# Altium PCB BNO055_Xplained_pro.PcbDoc
Units mm, origin at the board's own origin, x right, y up, seen from the top; angles counter-clockwise.
Board outline 37.5 x 30 mm, 4 copper layers (Top Layer LF-signals, Internal Plane 1, Internal Plane 2, Bottom Layer LF-signals), stack 1.379 mm thick; 36 components, 25 nets, 147 pads, 34 vias.
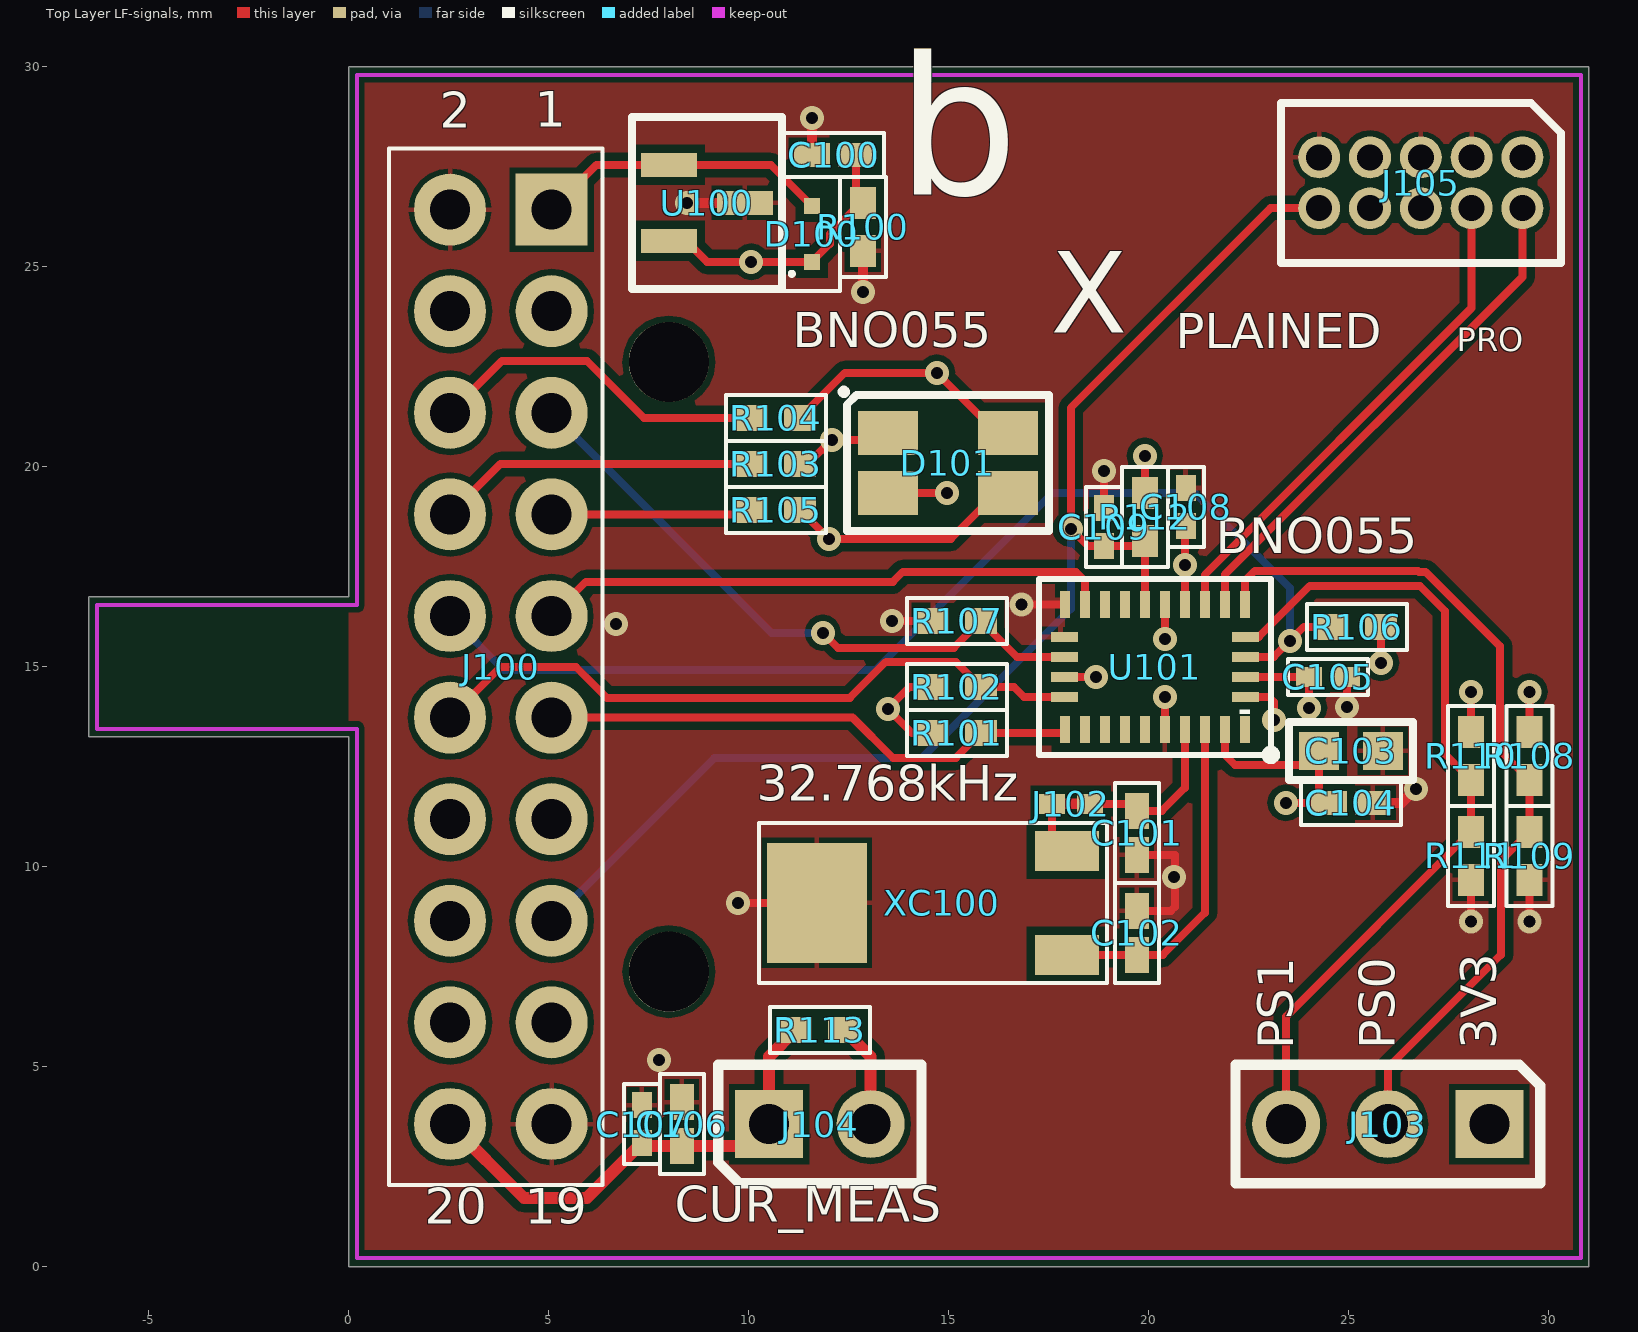
[diagram p0: Top Layer LF-signals view]
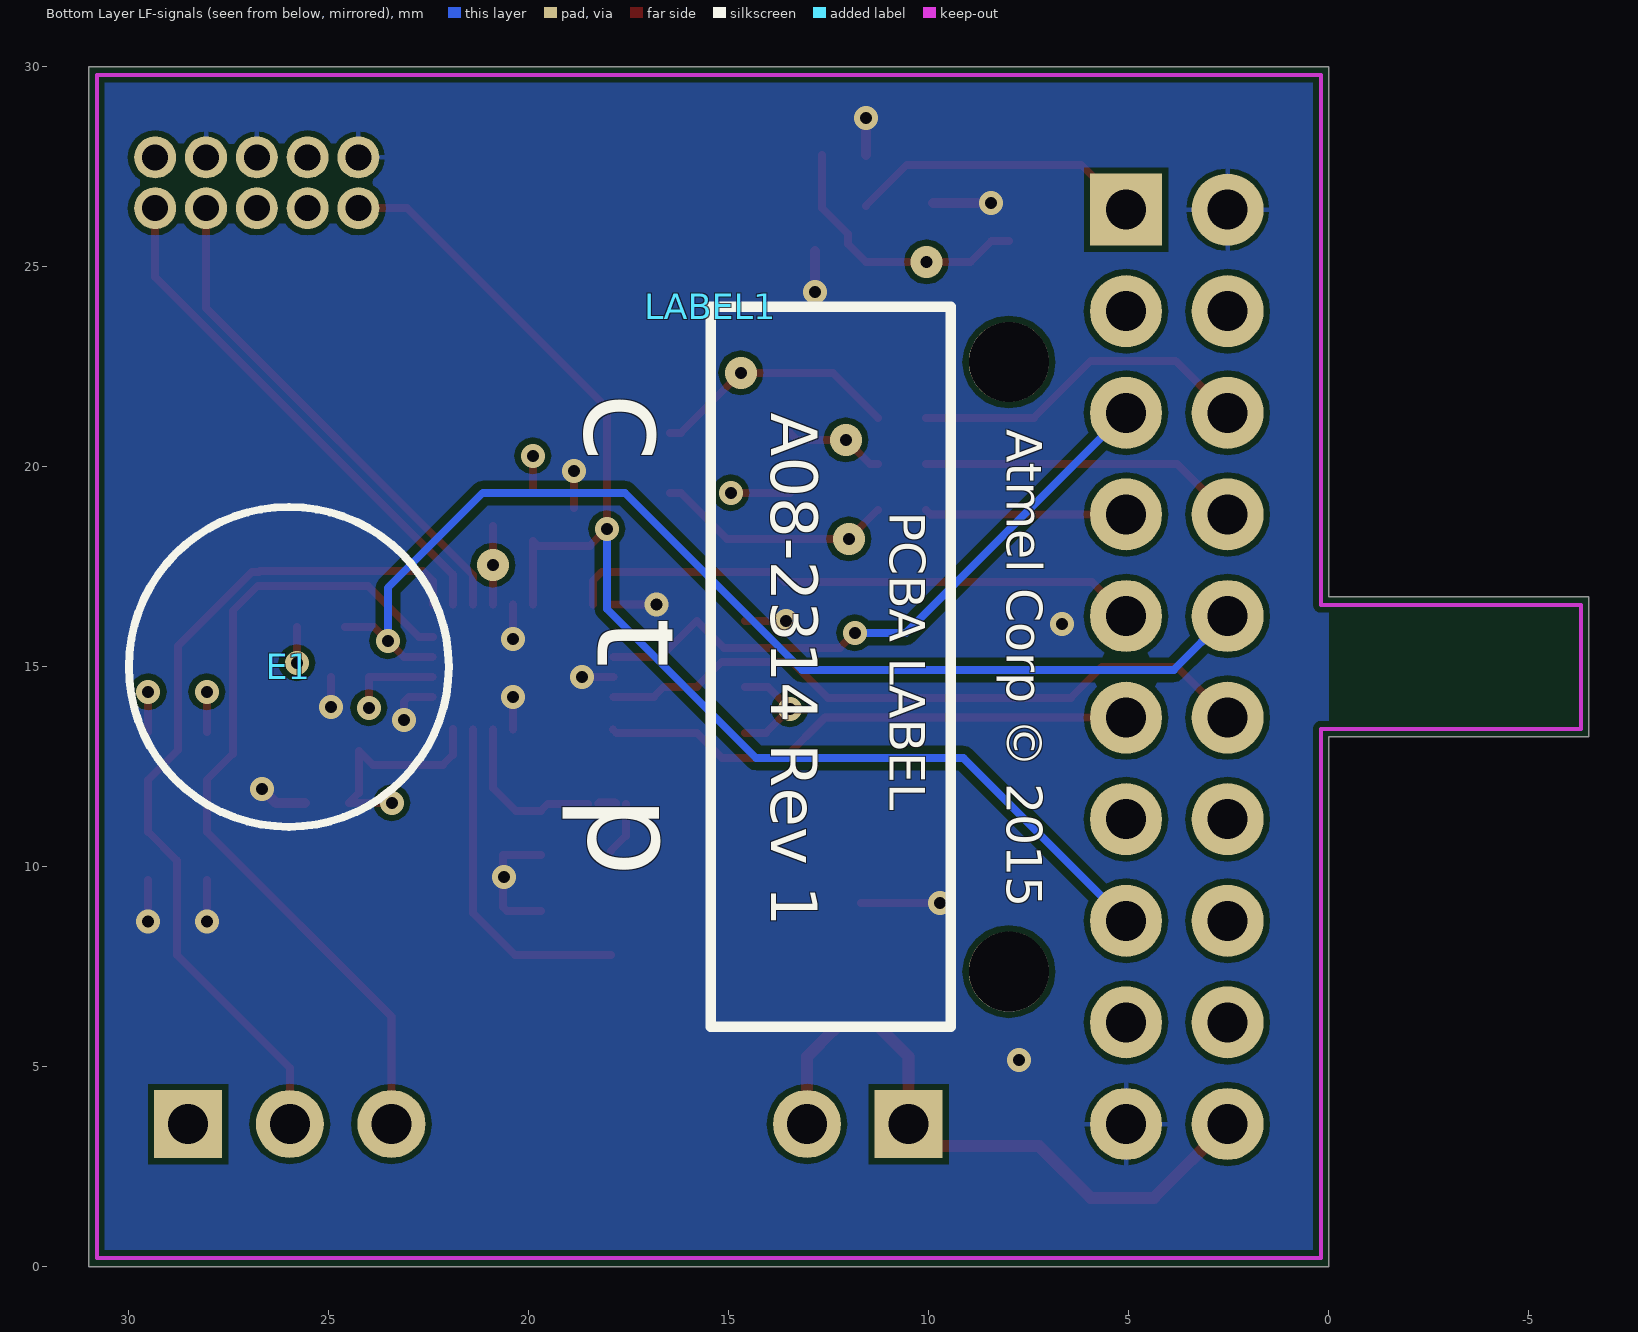
[diagram p1: Bottom Layer LF-signals view, seen from below]
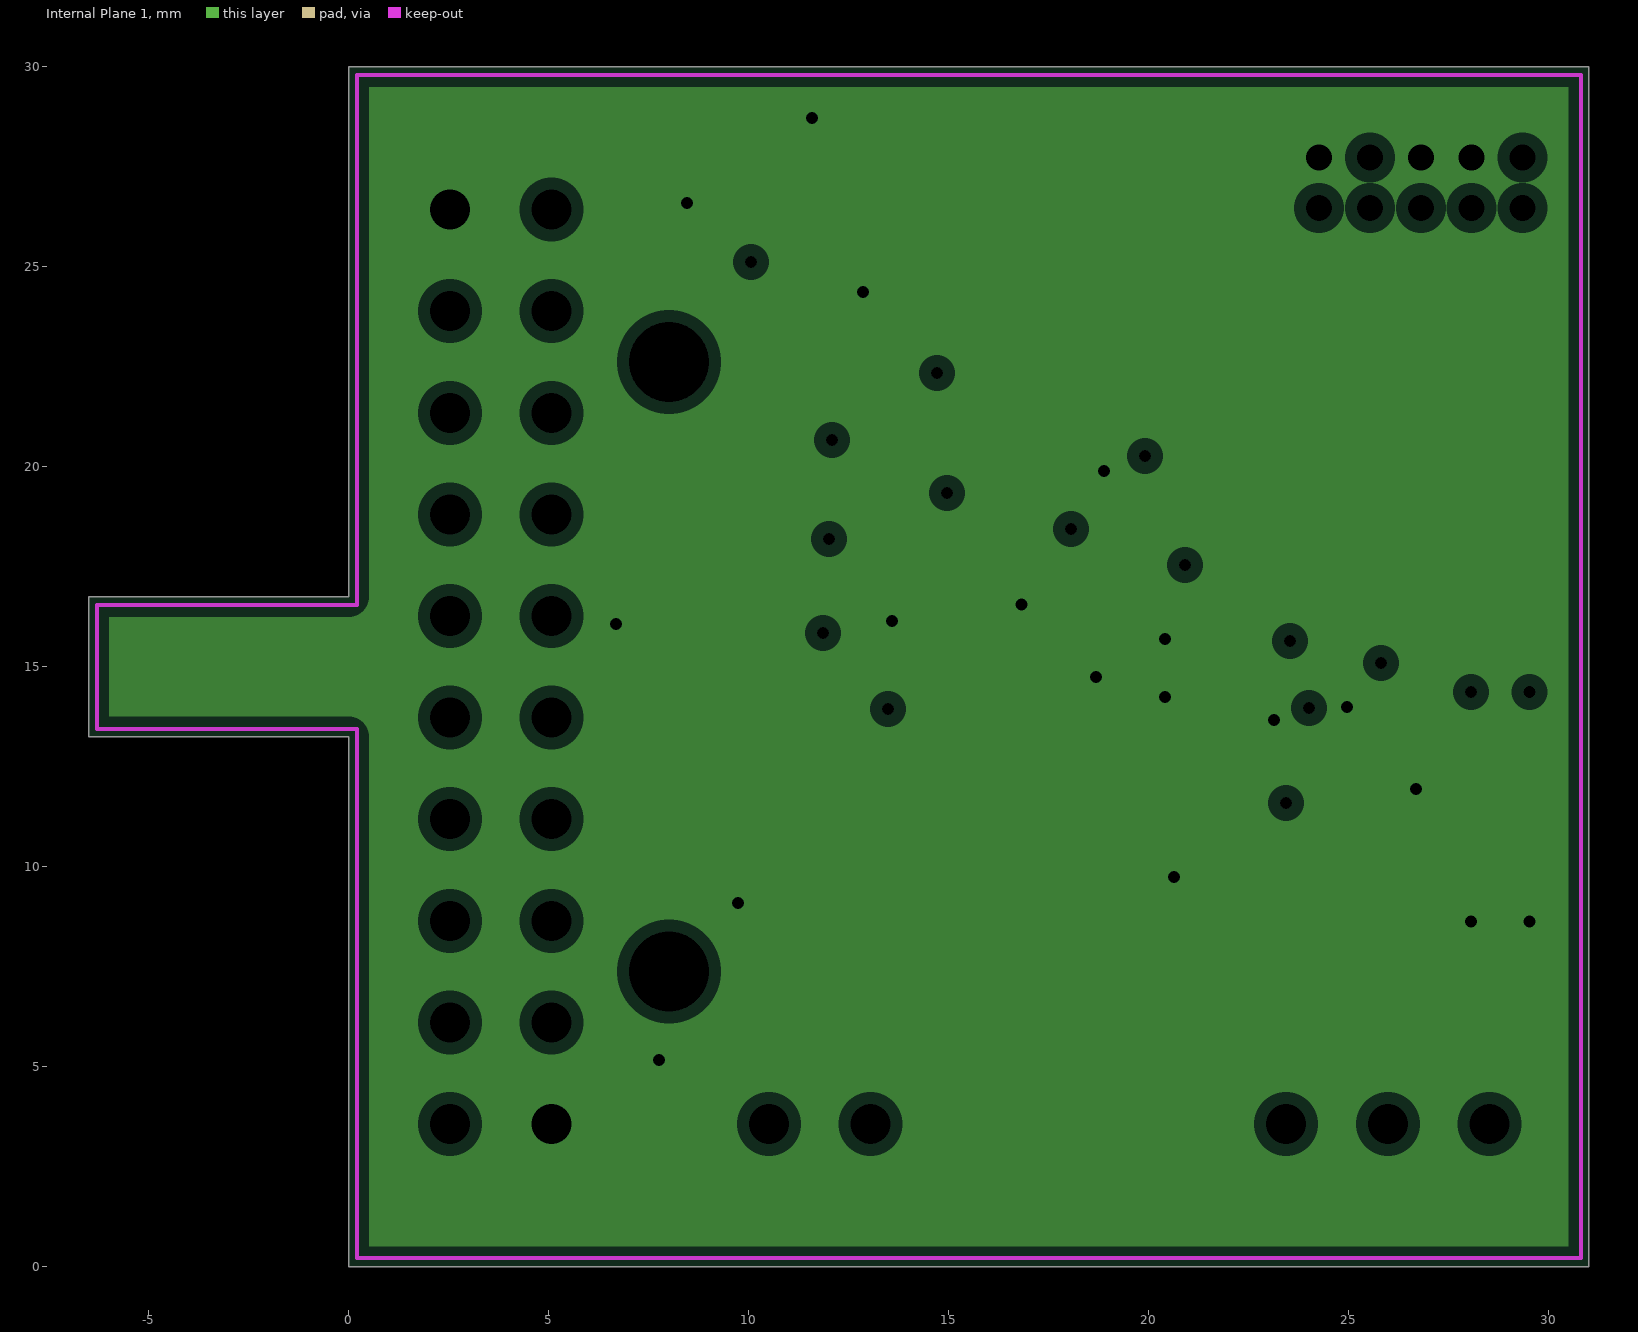
[diagram p2: Internal Plane 1, clearances drawn from the general rule]
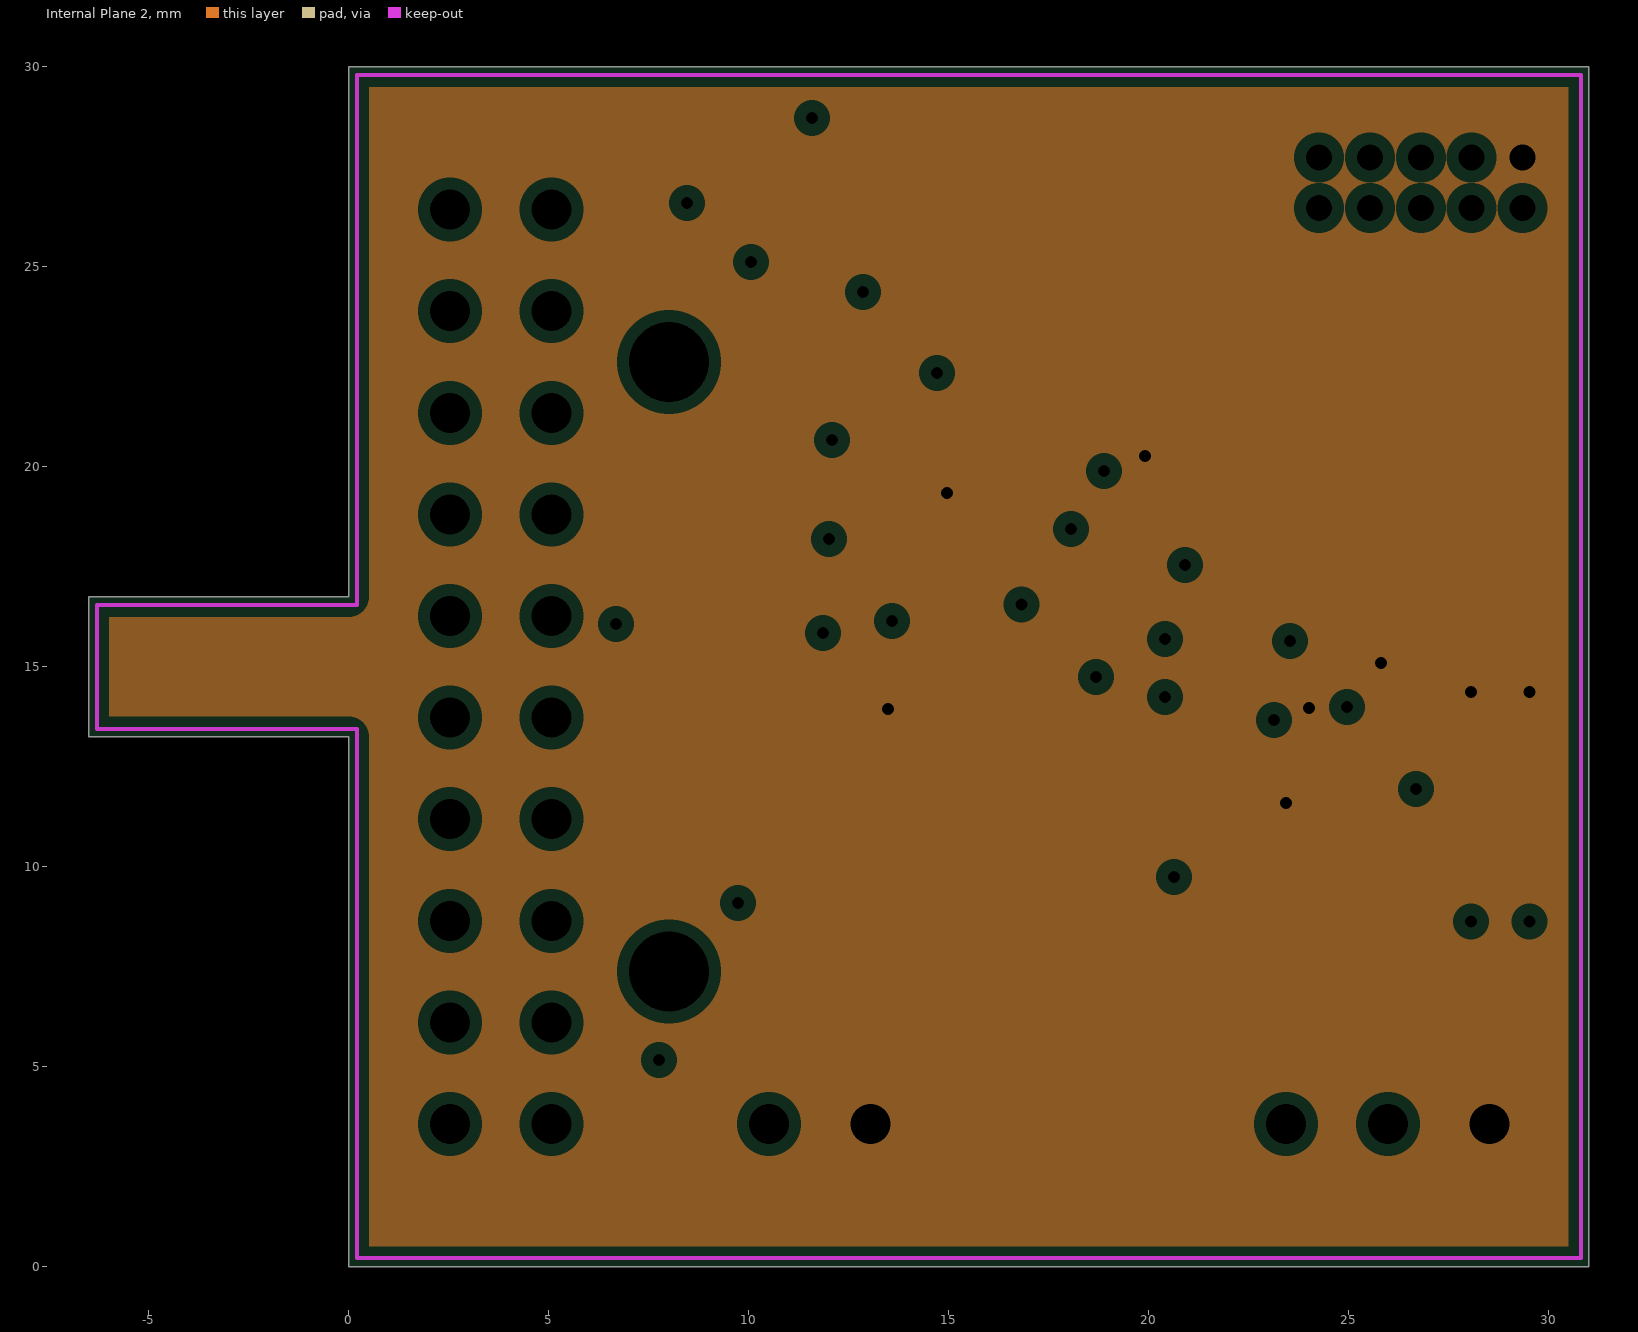
[diagram p3: Internal Plane 2, clearances drawn from the general rule]

## Layer stack, top to bottom
Top Solder: solder mask 0.0102, Solder Resist, Dk 3.5
Top Layer LF-signals: signal copper 0.0356
Dielectric1: prepreg 0.118, FR-4, Dk 4.2
Internal Plane 1: plane copper 0.036, net GND
Dielectric 3: prepreg 1, Dk 4.2
Internal Plane 2: plane copper 0.036, net VCC_3V3
Dielectric 2: prepreg 0.118, Dk 4.2
Bottom Layer LF-signals: signal copper 0.0356
Bottom Solder: solder mask 0.0102, Solder Resist, Dk 3.5

## Board outline
-6.5,13.25 -6.5,16.75 0,16.75 0,30 31,30 31,0 0,0 0,13.25

## Design rules (kind name [scope] priority, off if disabled: settings)
AcuteAngle [All] p1: minimum=7.00000000000000E+0001 checktracksonly=FALSE
AssemblyTestPointUsage "Schematic Assembly Testpoint Usage_2" [InNet('NetC101_2')] p1: valid=1
AssemblyTestPointUsage "Schematic Assembly Testpoint Usage_1" [InNet('NetC102_2')] p2: valid=1
AssemblyTestPointUsage "Schematic Assembly Testpoint Usage" [InNet('NetJ102_2')] p3: valid=1
AssemblyTestPointUsage [All] p4:
AssemblyTestpoint [All] p1: testpointundercomponent=TRUE minsize=0.8 maxsize=10 preferedsize=0.8 minholesize=0 maxholesize=2 preferedholesize=0.25 testpointgrid=0.025 usegrid=FALSE gridtolerance=0 allowsidebottom=TRUE minspacing=1.27 compbodyclearance=0.127
Clearance Clearance_Poly [IsRegion vs (OnLayer('Top Layer LF-signals') OR OnLayer('Bottom Layer LF-signals'))] p1: gap=0.2
Clearance [All] p2: gap=0.15
DiffPairsRouting [All] p1: maxlimit=0.2 minlimit=0.2 mostfreqgap=0.2 toplayer_minwidth=0.381 toplayer_maxwidth=0.381 toplayer_prefwidth=0.381 bottomlayer_minwidth=0.381 bottomlayer_maxwidth=0.381 bottomlayer_prefwidth=0.381 maxuncoupledlength=5
FabricationTestPointUsage TestPointUsage [All] p1: valid=0 allowmultiple=FALSE
FabricationTestpoint Testpoint [All] p1: side=2 testpointundercomponent=TRUE minsize=0.55 maxsize=10 preferedsize=0.8 minholesize=0 maxholesize=2 preferedholesize=0.25 testpointgrid=0 allowsidebottom=TRUE usegrid=FALSE gridtolerance=0 minspacing=1.27 compbodyclearance=0.127
HoleSize [All] p1: absolutevalues=TRUE maxlimit=10 minlimit=0.3 maxpercent=80.000 minpercent=20.000
HoleToHoleClearance [All] p1: gap=0.3 allowstackedmicrovias=TRUE
MinimumAnnularRing [All] p1: minimumring=0.1
MinimumSolderMaskSliver [All] p1: minsoldermaskwidth=0.075
NetAntennae [Not IsAssyTestpoint] p1: netantennaetolerance=0
PlaneClearance [All] p1: clearance=0.3
PlaneConnect PlaneConnect_VIA [IsVia] p1: planeconnectstyle=Direct reliefexpansion=0.508 reliefentries=4 reliefconductorwidth=0.254 reliefairgap=0.254
PlaneConnect "PlaneConnect 50mil" [HasFootprint('AP8-00257')] p2: planeconnectstyle=Relief reliefexpansion=0.2 reliefentries=4 reliefconductorwidth=0.2 reliefairgap=0.2
PlaneConnect [All] p3: planeconnectstyle=Relief reliefexpansion=0.508 reliefentries=4 reliefconductorwidth=0.254 reliefairgap=0.254
PolygonConnect PolygonConnect_VIA [IsVia OR HasPad('Free-666')] p1: connectstyle=Direct reliefconductorwidth=0.254 reliefentries=4 polygonreliefangle="90 Angle" airgapwidth=0.254
PolygonConnect [All] p2: connectstyle=Relief reliefconductorwidth=0.125 reliefentries=4 polygonreliefangle="90 Angle" airgapwidth=0.125
RoutingVias [All] p1: holewidth=0.3 width=0.6 viastyle="Through Hole" minholewidth=0.3 minwidth=0.6 maxholewidth=0.5 maxwidth=1
SMDNeckDown [All] p1: percent=90.000
SilkToSilkClearance SilkToSilkClearance_Text [IsText vs IsText] p1: silktosilkclearance=0
SilkToSilkClearance [All] p2: silktosilkclearance=0.1
SilkToSolderMaskClearance SilkscreenOverComponentPads [IsPad] p1: minsilkscreentomaskgap=0.01 clearancetoexposedcopper=TRUE
SolderMaskExpansion SolderMaskTenting [IsVia AND NOT (IsFabTestpoint OR IsAssyTestpoint OR InComponent('U300'))] p1: expansion=-1
SolderMaskExpansion [All] p2: expansion=0.05
ViasUnderSMD [All] p1: allowed=FALSE
Width [All] p1: maxlimit=5 minlimit=0.2 preferedwidth=0.2
17 further rules are at their usual default settings.

## Components (designator, comment, footprint, x,y, rotation, side; value= is the part's Value field where it differs from the comment)
C100 "" AP1-00001 12.125,27.8 r180 top
C101 "" AP1-00001 19.7,10.85 r90 top
C102 "" AP1-00001 19.7,8.35 r270 top
C103 "" AP1-00002 25.05,12.9 r0 top
C104 "" AP1-00001 25.05,11.6 r0 top
C105 "" AP1-00053 24.475,14.75 r0 top
C106 "" AP1-00001 8.325,3.57 r90 top
C107 "" AP1-00053 7.325,3.57 r90 top
C108 "" AP1-00053 20.925,19 r90 top
C109 "" AP1-00053 18.875,18.5 r90 top
D100 "Farnell# 1615809" AP4-00036 11.575,25.825 r90 top
D101 "Farnell no: 1855553" AP4-00104 14.975,20.1 r0 top
E1 "" AP8-00192 26,15 r180 bottom
J100 "" AP8-00621 3.8,15 r90 top locked
J102 "" AP8-00595 18.05,11.575 r180 top net-tie
J103 "" AP8-00745 25.975,3.57 r180 top locked
J104 "" AP8-00733 11.775,3.57 r0 top locked
J105 "" AP8-00257 26.8,27.1 r180 top locked
LABEL1 "" AP8-00317 15.45,24 r270 bottom
R100 "" AP2-00000 12.85,26 r90 top
R101 "" AP2-00000 15.2,13.35 r180 top
R102 "" AP2-00000 15.2,14.5 r180 top
R103 "" AP2-00000 10.675,20.075 r180 top
R104 "" AP2-00000 10.675,21.225 r180 top
R105 "" AP2-00000 10.675,18.925 r180 top
R106 "" AP2-00000 25.2,16 r0 top
R107 "" AP2-00000 15.2,16.15 r0 top
R108 "" AP2-00000 29.515,12.775 r90 top
R109 "" AP2-00000 29.515,10.275 r270 top
R110 "" AP2-00000 28.05,12.775 r90 top
R111 "" AP2-00000 28.05,10.275 r270 top
R112 "" AP2-00000 19.9,18.75 r270 top
R113 "" AP2-00000 11.775,5.925 r180 top
U100 "" AP4-00018 8.95,26.6 r0 top
U101 "" AP6-00430 20.15,15 r180 top
XC100 "Farnell order no:1539364" AP7-00044 17.95,9.1 r90 top

## Footprints (in the part's own frame and the unit in brackets; to place one, negate y for a bottom-side part, rotate by r counter-clockwise, add the part's x,y. Pads: shape width x height; smd on the part's side, far side on the other; paste and mask are expansions set on the pad)
AP1-00001 [mm] "Standard 0402 SMD capacitor footprint"
  rect 0.9x0.6 smd: 1(-0.55,0) 2(0.55,0)
  silkscreen extent -1.25,-0.55 1.25,0.55, body extent -0.5,-0.3 0.5,0.3, height 0.2
AP1-00002 [mm]
  rect 1x0.95 smd: 1(-0.8,0) 2(0.8,0)
  silkscreen extent -1.55,-0.72 1.55,0.72, body extent -0.8,-0.4 0.8,0.4, height 0.3
AP1-00053 [mm] "Chip Capacitor, 2-Leads, Body 1.0x0.5mm, IPC High Density"
  rect 0.65x0.5 smd: 1(-0.475,0) 2(0.475,0)
  silkscreen extent -1,-0.45 1,0.45, body extent -0.5,-0.3 0.5,0.3, height 0.2
AP2-00000 [mm] "Standard 0402 SMD resistor footprint"
  rect 0.8x0.65 smd: 1(-0.6,0) 2(0.6,0)
  silkscreen extent -1.25,-0.58 1.25,0.58, body extent -0.5,-0.3 0.5,0.3, height 0.2
AP4-00018 [mm]
  rect 1.4x0.6 smd: 1(-0.95,0.95) 2(-0.95,-0.95) 3(0.95,0)
  silkscreen extent -1.88,-2.15 1.88,2.15, body extent -1.25,-1.46 1.23,1.46, height 1
AP4-00036 [mm] "Molded Diode, 2-Leads, Body 1,2x0,8mm, IPC Medium Density"
  rect 0.4x0.4 smd: 1(-0.7,0) 2(0.7,0)
  silkscreen extent -1.43,-0.7 1.43,0.7, body extent -0.8,-0.4 0.8,0.4, height 0.7
AP4-00104 [mm] "SMD RGB LED PLCC-4 PLCC-4 package 2.8mm x3.2mm x1.9 mm (CC pinnumber)"
  rect 1.5x1.1 smd: 1(-1.5,0.75) 2(-1.5,-0.75) 3(1.5,-0.75) 4(1.5,0.75)
  silkscreen extent -2.62,-1.71 2.52,1.8, body extent -1.79,-1.71 1.81,1.69, height 1.95
AP6-00430 [mm]
  rect 0.25x0.675 smd mask+0.075: 1(-2.25,1.562) 6(-2.25,-1.562) 7(-1.75,-1.562) 8(-1.25,-1.562) 9(-0.75,-1.562) 10(-0.25,-1.562) 11(0.25,-1.562) 12(0.75,-1.562) 13(1.25,-1.562) 14(1.75,-1.562) 15(2.25,-1.562) 20(2.25,1.562) 21(1.75,1.562) 22(1.25,1.562) 23(0.75,1.562) 24(0.25,1.562) 25(-0.25,1.562) 26(-0.75,1.562) 27(-1.25,1.562) 28(-1.75,1.562)
  rect 0.675x0.25 smd mask+0.075: 2(-2.262,0.75) 3(-2.262,0.25) 4(-2.262,-0.25) 5(-2.262,-0.75) 16(2.262,-0.75) 17(2.262,-0.25) 18(2.262,0.25) 19(2.262,0.75)
  silkscreen extent -3,-2.2 2.9,2.3, body extent -2.6,-1.9 2.6,1.9, height 1.18
AP7-00044 [mm]
  rect 1x1.6 smd: 1(-1.3,0) 2(1.3,0)
  rect 3x2.5 smd: 3(0,6.25)
  silkscreen extent -2,-1 2,7.7, body extent -1.5,-0.7 1.5,7.4, height 2.08
AP8-00192 [mm]
  silkscreen extent -4,-4 4,4, body extent -4,-4 4,4, height 2.79
AP8-00257 [mm]
  round 1.05 hole 0.65: 1(-2.54,-0.635) 2(-2.54,0.635) 3(-1.27,-0.635) 4(-1.27,0.635) 5(0,-0.635) 6(0,0.635) 7(1.27,-0.635) 8(1.27,0.635) 9(2.54,-0.635) 10(2.54,0.635)
  silkscreen extent -3.5,-2 3.5,2, body extent -3.15,-1.64 3.2,1.79, height 3.88
AP8-00317 [mm] "Placement area for 18x6mm sticker"
  silkscreen extent 0,0 18,6
AP8-00595 [mm]
  rect 0.65x0.5 smd: 1(-0.475,0) 2(0.475,0)
  Top Layer LF-signals lines w0.254: 0.2,0 -0.175,0
AP8-00621 [mm] "2x5 Receptacle THM, Right Angle. No Guide. 2.54mm pitch. Length 13.2mm, width 5.0mm, height 5mm"
  rect 1.8x1.8 hole 1: 1(11.43,-1.27)
  rect 2.1x2.1 on Top Paste: 1(11.43,-1.27) 2(11.43,1.27) 3(8.89,-1.27) 4(8.89,1.27) 5(6.35,-1.27) 6(6.35,1.27) 7(3.81,-1.27) 8(3.81,1.27) 9(1.27,-1.27) 10(1.27,1.27) 11(-1.27,-1.27) 12(-1.27,1.27) 13(-3.81,-1.27) 14(-3.81,1.27) 15(-6.35,-1.27) 16(-6.35,1.27) 17(-8.89,-1.27) 18(-8.89,1.27) 19(-11.43,-1.27) 20(-11.43,1.27)
  round 1.8 hole 1: 2(11.43,1.27) 3(8.89,-1.27) 4(8.89,1.27) 5(6.35,-1.27) 6(6.35,1.27) 7(3.81,-1.27) 8(3.81,1.27) 9(1.27,-1.27) 10(1.27,1.27) 11(-1.27,-1.27) 12(-1.27,1.27) 13(-3.81,-1.27) 14(-3.81,1.27) 15(-6.35,-1.27) 16(-6.35,1.27) 17(-8.89,-1.27) 18(-8.89,1.27) 19(-11.43,-1.27) 20(-11.43,1.27)
  body extent -12.95,-1.47 12.95,11.3, height 4.98
AP8-00733 [mm] "Pin header 1x2 Pin in Paste"
  rect 1.7x1.7 / inner round 1.7 / far side rect 1.7x1.7 hole 1: 1(-1.27,0)
  round 1.7 hole 1: 2(1.27,0)
  silkscreen extent -2.54,-1.48 2.54,1.48, body extent -2.54,-1.27 2.54,1.27, height 8.38
AP8-00745 [mm] "THM Pin-header 1x3 100mil pitch, 1mm hole"
  rect 1.7x1.7 / inner round 1.7 / far side rect 1.7x1.7 hole 1: 1(-2.54,0)
  round 1.7 hole 1: 2(0,0) 3(2.54,0)
  silkscreen extent -3.81,-1.48 3.81,1.48, body extent -3.81,-1.27 3.81,1.27, height 8.38

## Part data
C100 C106: library part A01-0347, "Ceramic capacitor, SMD 0402, X5R, 6.3V, +/-20% (de33687)"
C101 C102: library part A01-0013, "Ceramic capacitor, SMD 0402, NP0, 50V, +/-5%"
C103: library part A01-0711, "Ceramic capacitor, SMD 0603, X7R, 10V, ±10%"
C104: library part A01-0048, "Ceramic capacitor, SMD 0402, X7R, 25V, +/-10%"
C105 C107 C108 C109: library part A01-0246, "Ceramic capacitor, SMD 0402, X7R, 16V, +/-10%"
D100: library part A04-0049, "Schottky diode, If:200mA, Vf:0.35V, Vrrm:30V, SOD-523"
D101: library part A10-0126, "LED, RGB, diffuse lens, SMD PLCC-4"
E1: library part A08-0053, "2.8mm adhesive feet,diam 8.0mm"
J100: library part A08-1512, "2x10, female pin header receptable, right-angled, 2.54mm pitch, THM, Pin In Paste"
J102: library part A08-1454, "Closed Link 0402"
J103: library part A08-1799, "1x3 pin header, 2.54mm pitch, Pin-in-Paste THM, 1mm hole"
J104: library part A08-1754, "1x2 pin header, 2.54mm pitch, Pin-in-Paste THM"
J105: library part A08-0385, "2x5 pin header, 1.27mm pitch, THM"
LABEL1: library part A09-0611, "PCBA identification label PP Top White Gloss"
R100 R107: library part A02-0260, "Thick film resistor, SMD 0402, 1/16W, 1%"
R101 R102 R106 R109 R111 R112: library part A02-0236, "Thick film resistor, SMD 0402, 1/16W, 1%"
R103 R105: library part A02-0216, "Thick film resistor, SMD 0402, 1/16W, 1%"
R104: library part A02-0220, "Thick film resistor, SMD 0402, 1/16W, 1%"
R108 R110 R113: library part A02-0163, "RES 0.0 OHM 1/16W 0402 SMD"
U100: library part A06-0571, "ATSHA204 with 1-wire interface and SOT23-3 package"
U101: library part A06-1259, "Intelligent 9-Axis Absolute orientation sensor"
XC100: library part A07-0052, "32k768 crystal, +-20ppm, CL=7pF, max ESR 60kOhm, SMD"

## Free pads (board coordinates)
  round 2 hole 2 unplated: 2(8,22.62) 3(8,7.38)

## Via types
v1: diameter 0.6, hole 0.3, Top Layer LF-signals to Bottom Layer LF-signals, tented both sides, 29 vias
v2: diameter 0.6/0.8 (per signal layer), hole 0.3, Top Layer LF-signals to Bottom Layer LF-signals, tented top, 5 vias

## Nets (pads, with @x,y where several pads share a name; then routed paths per layer and width w, separated by ;. In a path a pad name is that pad's centre, name@x,y a point inside that pad or via, vN(x,y) a via of type N, cw(c..) or ccw(c..) an arc to the next point about the centre after c; other vN are vias at no path point)
ADDR0: J100.5@5.07,21.35 R107.2 U101.17 | length 15.9
  Top Layer LF-signals w0.2: v1(11.85,15.85) 12.225,15.475 15.125,15.475 R107.2 16.7,15.25 U101.17
  Bottom Layer LF-signals w0.2: J100.5@5.07,21.35 10.57,15.85 v1(11.85,15.85)
BOOT: J100.10@2.53,16.27 R106.1 U101.4 | length 28.2
  Top Layer LF-signals w0.2: U101.4 23.125,15.25 v1(23.525,15.65) 23.875,16 R106.1
  Bottom Layer LF-signals w0.2: J100.10@2.53,16.27 3.875,14.925 13.175,14.925 17.6,19.35 21.15,19.35 23.525,16.975 v1(23.525,15.65)
GND: C100.2 C101.1 C102.1 C103.2 C104.2 C105.2 C106.2 C107.2 C108.2 C109.2 J100.2@2.53,26.43 J100.19@5.07,3.57 J105.3 J105.5 J105.9 R100.1 R107.1 R109.2 R111.2 U100.3 U101.2 U101.10 U101.15 U101.16 U101.18 U101.25 XC100.3 | length 19.4
  Top Layer LF-signals w0.2: v1(9.725,9.1) XC100.3 ; v1(13.575,16.15) R107.1 ; v1(16.813,16.562) U101.15 ; U101.18 v1(18.675,14.75) ; C109.2 v1(18.875,19.9) ; C102.1 20.55,8.9 20.65,9 20.65,10.3 C101.1 ; U101.25 v1(20.4,14.25) ; v1(20.4,15.7) U101.10 ; U101.2 23,14.25 23.125,14.125 v1(23.125,13.675) ; v1(24.95,14) C105.2 ; v1(28.05,8.635) R111.2 ; v1(29.515,8.635) R109.2
  Top Layer LF-signals w0.25: v1(8.45,26.6) U100.3 ; C100.2 v1(11.575,28.725) ; v1(12.85,24.375) R100.1 ; C104.2 26.325,11.6 v1(26.675,11.95)
  other v1: 7.75,5.175 20.625,9.75 6.675,16.075
INT: J100.9@5.07,16.27 U101.14 | length 14.5
  Top Layer LF-signals w0.2: J100.9@5.07,16.27 5.925,17.125 13.6,17.125 13.85,17.375 18.175,17.375 18.4,17.15 U101.14@18.4,16.56
LED_B: J100.7@5.07,18.81 R105.2 | length 5.1
  Top Layer LF-signals w0.2: J100.7@5.07,18.81 9.96,18.81 R105.2
LED_G: J100.6@2.53,21.35 R104.2 | length 8.7
  Top Layer LF-signals w0.2: J100.6@2.53,21.35 3.83,22.65 5.95,22.65 7.375,21.225 R104.2
LED_R: J100.8@2.53,18.81 R103.2 | length 8.1
  Top Layer LF-signals w0.2: J100.8@2.53,18.81 3.795,20.075 R103.2
NetC100_1: C100.1 D100.1 R100.2 U100.2 | length 6.9
  Top Layer LF-signals w0.2: U100.2 8.428,25.65 8.953,25.125 v2(10.058,25.125) D100.1 12.025,25.575 12.025,25.825 12.675,26.475 C100.1
NetC101_2: C101.2 J102.1 U101.26 | length 4.1
  Top Layer LF-signals w0.2: J102.1 19.525,11.575 C101.2 20.325,11.4 20.9,11.975 U101.26
NetC102_2: C102.2 U101.27 XC100.1 | length 8.5
  Top Layer LF-signals w0.2: XC100.1 20.35,7.8 21.4,8.85 U101.27
NetC108_1: C108.1 U101.9 | length 2
  Top Layer LF-signals w0.2: U101.9 C108.1@20.9,18.525
  other v2: 20.9,17.544
NetD100_2: D100.2 J100.1@5.07,26.43 U100.1 | length 7.4
  Top Layer LF-signals w0.2: J100.1@5.07,26.43 6.19,27.55 U100.1 10.55,27.55 D100.2
NetD101_1: D101.1 R103.1 | length 2.5
  Top Layer LF-signals w0.2: R103.1 11.475,20.075 v2(12.076,20.676) 12.126,20.676 13.301,20.676 D101.1
NetD101_3: D101.3 R105.1 | length 6
  Top Layer LF-signals w0.2: R105.1 v2(12,18.2) 15.05,18.2 16.2,19.35 D101.3
NetD101_4: D101.4 R104.1 | length 6.3
  Top Layer LF-signals w0.2: R104.1 12.4,22.35 v2(14.7,22.35) 16.2,20.85 D101.4
NetJ102_2: J102.2 XC100.2 | length 1.3
  Top Layer LF-signals w0.2: J102.2 17.575,10.775 XC100.2
PIN7: J105.2 U101.7 | length 13
  Top Layer LF-signals w0.2: U101.7@21.9,16.56 21.9,17.305 29.34,24.745 J105.2
PIN8: J105.4 U101.8 | length 12.7
  Top Layer LF-signals w0.2: U101.8@21.4,16.56 21.4,17.3 28.07,23.97 J105.4
PS0: J103.2 R108.1 R109.1 U101.6 | length 21.6
  Top Layer LF-signals w0.2: U101.6@22.4,16.56 22.4,17.15 22.65,17.4 26.725,17.4 26.75,17.375 26.92,17.375 28.775,15.52 28.775,12.915 R108.1 R109.1 28.8,10.16 28.8,7.8 25.975,4.975 J103.2
PS1: J103.3 R110.1 R111.1 U101.5 | length 20.8
  Top Layer LF-signals w0.2: U101.5@22.4,15.75 22.75,15.75 24.025,17.025 26.775,17.025 27.4,16.4 27.4,12.825 R110.1 R111.1 23.435,6.26 J103.3
RESET: C109.1 J100.15@5.07,8.65 J105.10 R112.2 U101.11 | length 33.2
  Top Layer LF-signals w0.2: U101.11 R112.2 19.775,18.025 C109.1 18.475,18.025 v1(18.05,18.45) 18.05,21.475 23.04,26.465 J105.10
  Bottom Layer LF-signals w0.2: J100.15@5.07,8.65 9.135,12.715 14.315,12.715 18.05,16.45 v1(18.05,18.45)
SCL: J100.12@2.53,13.73 R102.1 U101.19 | length 16.9
  Top Layer LF-signals w0.2: J100.12@2.53,13.73 3.8,15 5.675,15 6.45,14.225 12.525,14.225 13.425,15.125 15.175,15.125 R102.1 16.625,14.5 16.875,14.25 U101.19
SDA: J100.11@5.07,13.73 R101.1 U101.20 | length 13.5
  Top Layer LF-signals w0.2: J100.11@5.07,13.73 12.595,13.73 13.6,12.725 15.175,12.725 R101.1 17.813,13.35 U101.20
VCC_3V3: C103.1 C104.1 C105.1 D101.2 J103.1 J104.2 J105.1 R101.2 R102.2 R106.2 R108.2 R110.2 R112.1 R113.1 U101.3 U101.28 | length 18.7
  Top Layer LF-signals w0.2: D101.2 v1(14.95,19.35) ; R101.2 14.075,13.35 v1(13.475,13.95) 14.025,14.5 R102.2 ; R112.1 v1(19.9,20.275) ; U101.28@21.9,13.44 U101.28 21.9,12.8 22.15,12.55 23.9,12.55 C103.1 24.25,11.85 C104.1 v1(23.425,11.6) ; U101.3 C105.1 v1(24,13.975) ; v1(25.8,15.1) R106.2 ; R110.2 v1(28.05,14.375) ; R108.2 v1(29.515,14.375)
  Top Layer LF-signals w0.3: R113.1 13.045,5.255 J104.2
VCC_TARGET: C106.1 C107.1 J100.20@2.53,3.57 J104.1 R113.2 | length 12.1
  Top Layer LF-signals w0.3: J100.20@2.53,3.57 4.375,1.725 5.955,1.725 7.25,3.02 C106.1 9.955,3.02 J104.1 10.505,5.255 R113.2
pads on no net: J100.1@5.07,26.43 J100.2@2.53,26.43 J100.3 J100.4 J100.5@5.07,21.35 J100.6@2.53,21.35 J100.7@5.07,18.81 J100.8@2.53,18.81 J100.9@5.07,16.27 J100.10@2.53,16.27 J100.11@5.07,13.73 J100.12@2.53,13.73 J100.13 J100.14 J100.15@5.07,8.65 J100.16 J100.17 J100.18 J100.19@5.07,3.57 J100.20@2.53,3.57 J105.6 J105.7 J105.8 U101.1 U101.12 U101.13 U101.21 U101.22 U101.23 U101.24

## Polygon pours and split planes (outlines as drawn)
GND on Bottom Layer LF-signals "Mechanical 1-No Net" (solid, remove dead copper, pour order 4): 0,0 0,30 38.5,30 38.5,0
GND on Top Layer LF-signals "Mechanical 1-No Net" (solid, remove dead copper, pour order 3): 0,0 0,30 38.5,30 38.5,0
GND on Internal Plane 1 (split plane): 30.49,0.51 0.51,0.51 0.51,13.25 0.501,13.35 0.472,13.445 0.424,13.534 0.361,13.611 0.284,13.674 0.195,13.722 0.1,13.751 0,13.76 -5.99,13.76 -5.99,16.24 0,16.24 0.1,16.249 0.195,16.278 0.284,16.326 0.361,16.389 0.424,16.466 0.472,16.555 0.501,16.65 0.51,16.75 0.51,29.49 30.49,29.49
VCC_3V3 on Internal Plane 2 (split plane): 30.49,0.51 0.51,0.51 0.51,13.25 0.501,13.35 0.472,13.445 0.424,13.534 0.361,13.611 0.284,13.674 0.195,13.722 0.1,13.751 0,13.76 -5.99,13.76 -5.99,16.24 0,16.24 0.1,16.249 0.195,16.278 0.284,16.326 0.361,16.389 0.424,16.466 0.472,16.555 0.501,16.65 0.51,16.75 0.51,29.49 30.49,29.49

## Keep-outs
Keep-Out Layer:
  lines w0.1: -6.3,13.45 -6.3,16.55 0.2,16.55 0.2,29.8 30.8,29.8 30.8,0.225 0.2,0.225 0.2,13.45 -6.3,13.45

## Other copper
Top Layer LF-signals:
  pour cut-out: 17.9,16.562 22.397,16.562 22.4,16.56 22.4,13.438 17.9,13.438

## Silkscreen, mask and mechanical layers (free items; w line width, h text height)
Top Overlay:
  lines w0.1: 1.006,2.046 6.34,2.046 6.34,27.954 1.006,27.954 1.006,2.046
  text "1" at 4.65,28.2 h1.52
  text "2" at 2.275,28.175 h1.52
  text "b" at 13.7,25.65 h6
  text "BNO055" at 11.1,22.7 h1.5
  text "X" at 17.55,22.675 h3.5
  text "PLAINED" at 20.675,22.675 h1.5
  text "PRO" at 27.7,22.688 h1
  text "BNO055" at 21.675,17.545 h1.52
  text "32.768kHz" at 10.2,11.35 h1.52
  text "PS1" at 23.905,5.445 h1.52 r90
  text "PS0" at 26.445,5.444 h1.52 r90
  text "3V3" at 28.985,5.444 h1.52 r90
  text "CUR_MEAS" at 8.153,0.825 h1.52
  text "20" at 1.9,0.775 h1.52
  text "19" at 4.4,0.775 h1.52
Bottom Overlay:
  text "c" at 19.35,21.85 h4 r90
  text "A08-2314 Rev 1" at 14.325,21.35 h2 r90
  text "Atmel Corp © 2015" at 8.35,20.938 h1.52 r90
  text "t" at 19.025,16.225 h4 r90
  text "p" at 19.25,11.775 h4 r90
Mechanical 1:
  the board outline again, w0.1
Mechanical 4:
  text "Connector Placement" at -6.604,35.25 h5
  text "Extension Connector 2" at 5.35,7.654 h1 r90
Mechanical 6:
  text "Mechanical Dimensions" at -8.875,31.575 h5

## Dimensions
-6.5,13.25 to 31,0 on Mechanical 6
31,0 to 31,30 on Mechanical 6
0,0 to 31,0 on Mechanical 6
0,0 to 3.8,14.5 on Mechanical 4
4.292,15 to 0,0 on Mechanical 4

## Text inside footprints (layer, text, board x,y; h text height)
LABEL1: Bottom Overlay "PCBA LABEL" at 11.275,18.875 h1.52 r90